# EAGLE board electronic_load (EAGLE 7.3.0)
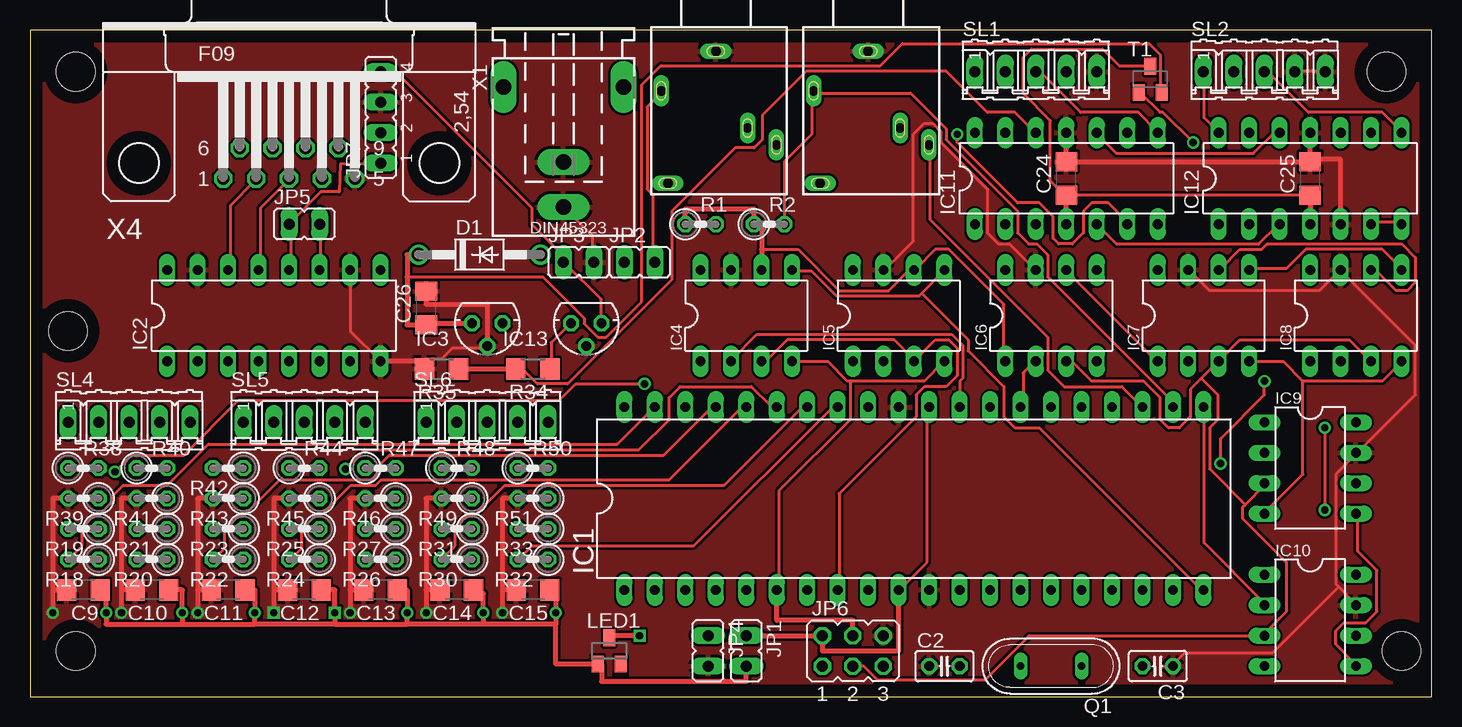
[diagram p0: board, top side]
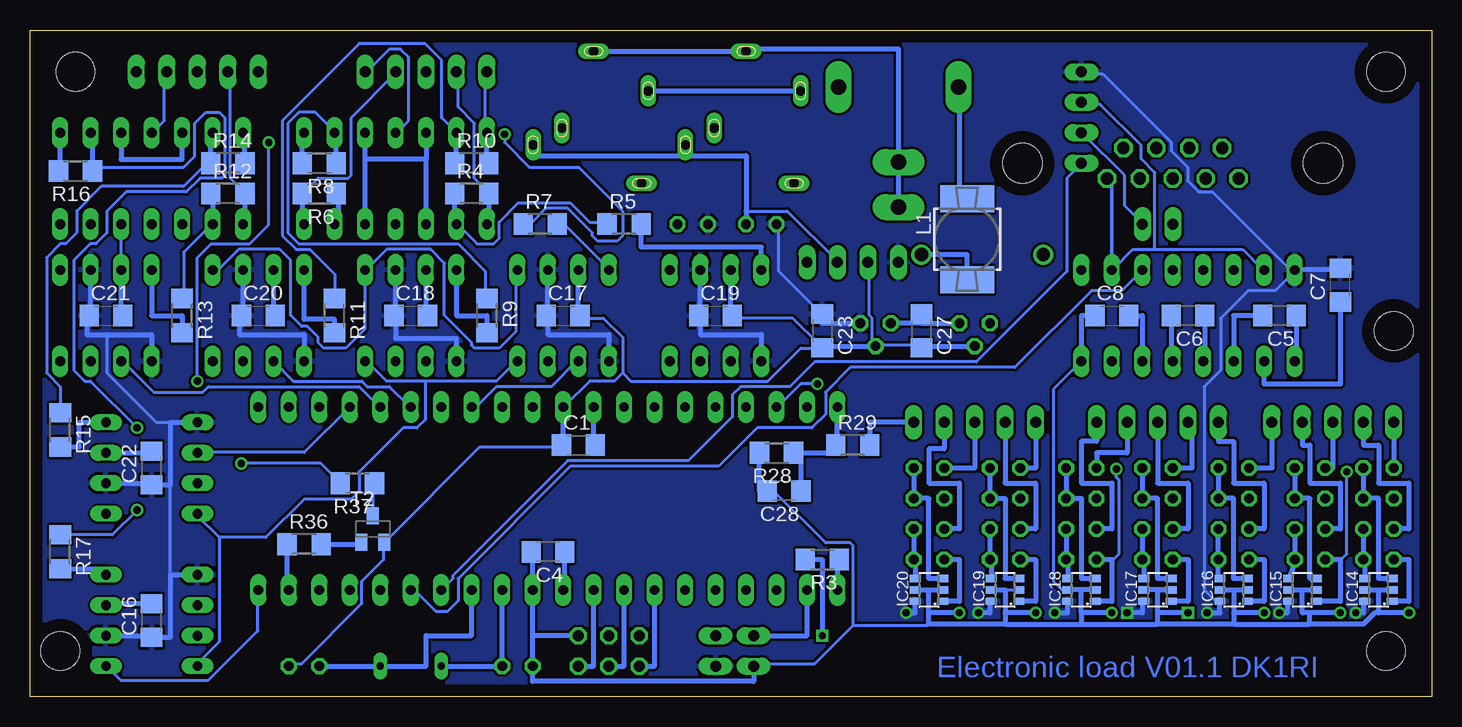
[diagram p1: board, bottom side, seen from below]

Size 116.82 x 55.55 mm. Coordinates in mm from the lower left corner, seen from the top.
Outline: 0,0 116.82,0 116.82,55.55 0,55.55 0,0
Copper layers (1*16): Top 0.035mm / dielectric 1.5mm / Bottom 0.035mm
Design rules "default": minimum track width 10mil, minimum drill 24mil, track to track 8mil, track to pad 8mil, pad to pad 8mil, via to via 8mil, smd to smd 8mil, copper to edge 40mil, drill to drill 8mil, minimum pad ring 10mil, minimum via ring 8mil, stop-mask expansion 4mil, vias tented up to drill 0mil, thermal gap 10mil
Holes 3.2 mm at 3.81,52.07 3.81,3.81 114.3,3.81 113.03,52.07 3.17,30.48

## Footprints (pad centres in the part's own frame; a part is rotated, then mirrored left to right if it is on the bottom)
C1206 = smd 1.6 x 1.8: 1 -1.4,0; 2 1.4,0
C025-025X050 = drill 0.813 octagon: 1 -1.27,0; 2 1.27,0
DO41-10 = drill 1.118: A 5.08,0; C -5.08,0
DIL40 = drill 0.813 long: 1 -24.13,-7.62; 2 -21.59,-7.62; 3 -19.05,-7.62; 4 -16.51,-7.62; 5 -13.97,-7.62; 6 -11.43,-7.62; 7 -8.89,-7.62; 8 -6.35,-7.62; 9 -3.81,-7.62; 10 -1.27,-7.62; 11 1.27,-7.62; 12 3.81,-7.62; 13 6.35,-7.62; 14 8.89,-7.62; 15 11.43,-7.62; 16 13.97,-7.62; 17 16.51,-7.62; 18 19.05,-7.62; 19 21.59,-7.62; 20 24.13,-7.62; 21 24.13,7.62; 22 21.59,7.62; 23 19.05,7.62; 24 16.51,7.62; 25 13.97,7.62; 26 11.43,7.62; 27 8.89,7.62; 28 6.35,7.62; 29 3.81,7.62; 30 1.27,7.62; 31 -1.27,7.62; 32 -3.81,7.62; 33 -6.35,7.62; 34 -8.89,7.62; 35 -11.43,7.62; 36 -13.97,7.62; 37 -16.51,7.62; 38 -19.05,7.62; 39 -21.59,7.62; 40 -24.13,7.62
DIL16 = drill 0.813 long: 1 -8.89,-3.81; 2 -6.35,-3.81; 3 -3.81,-3.81; 4 -1.27,-3.81; 5 1.27,-3.81; 6 3.81,-3.81; 7 6.35,-3.81; 8 8.89,-3.81; 9 8.89,3.81; 10 6.35,3.81; 11 3.81,3.81; 12 1.27,3.81; 13 -1.27,3.81; 14 -3.81,3.81; 15 -6.35,3.81; 16 -8.89,3.81
78LXX = drill 0.813 octagon: GND 0,1.905; IN 1.27,0; OUT -1.27,0
DIL08 = drill 0.813 long: 1 -3.81,-3.81; 2 -1.27,-3.81; 3 1.27,-3.81; 4 3.81,-3.81; 5 3.81,3.81; 6 1.27,3.81; 7 -1.27,3.81; 8 -3.81,3.81
DIL14 = drill 0.813 long: 1 -7.62,-3.81; 2 -5.08,-3.81; 3 -2.54,-3.81; 4 0,-3.81; 5 2.54,-3.81; 6 5.08,-3.81; 7 7.62,-3.81; 8 7.62,3.81; 9 5.08,3.81; 10 2.54,3.81; 11 0,3.81; 12 -2.54,3.81; 13 -5.08,3.81; 14 -7.62,3.81
SOT23-6 = smd 0.6 x 0.9: 1 -0.95,-1.15; 2 0,-1.15; 3 0.95,-1.15; 4 0.95,1.15; 5 0,1.15; 6 -0.95,1.15
JP1 = drill 0.914 long: 1 0,-1.27; 2 0,1.27
JP3Q = drill 0.914 octagon: 1 -2.54,-1.27; 2 -2.54,1.27; 3 0,-1.27; 4 0,1.27; 5 2.54,-1.27; 6 2.54,1.27
JP4 = drill 0.914 long: 1 -3.81,0; 2 -1.27,0; 3 1.27,0; 4 3.81,0
MS85 = smd 4.5 x 2.25: 1 0,-3.383; 2 0,3.383
SOT23 = smd 1 x 1.4: 1 -0.95,-1.1; 2 0.95,-1.1; 3 0,1.1
QS = drill 0.61 long: 1 -2.54,0; 2 2.54,0
0207/2V = drill 0.813 octagon: 1 -1.27,0; 2 1.27,0
R1206 = smd 1.6 x 1.803: 1 -1.422,0; 2 1.422,0
05P = drill 0.914 long: 1 -5.08,0; 2 -2.54,0; 3 0,0; 4 2.54,0; 5 5.08,0
SOT23-BEC = smd 1 x 1.4: B -0.95,-1.1; C 0,1.1; E 0.95,-1.1
737992-5 = drill 1.3 pad 2.184 long: + 0,10; -1 5,0; -2 -5,0; K 0,6.25
1503_09 = drill 0.8 pad 1.2 long: 1 0,-2.1; 2 -4.55,-5.4; 3 5.05,-9.9; 4 -4,-13.1; 5 2.65,-8.5
F09H = drill 1.016 octagon: 1 -5.486,-1.27; 2 -2.743,-1.27; 3 0,-1.27; 4 2.743,-1.27; 5 5.486,-1.27; 6 -4.115,1.27; 7 -1.372,1.27; 8 1.372,1.27; 9 4.115,1.27 | hole 3.302: -12.522,0; 12.522,0

## Placement (x,y rotation side)
C1  22uF 1210  [C1206]  71.12,20.95 0 bottom
C2  18pF  [C025-025X050]  76.2,2.54 0 top
C3  18pF  [C025-025X050]  93.98,2.54 180 top
C4  22uF 1210  [C1206]  73.66,12.06 180 bottom
C5  22u 1210  [C1206]  12.7,31.75 180 bottom
C6  22u 1210  [C1206]  20.32,31.75 180 bottom
C7  22u 1210  [C1206]  7.62,34.29 90 bottom
C8  22u 1210  [C1206]  26.67,31.75 0 bottom
C9  22uF 1210  [C1206]  4.45,8.89 180 top
C10  22uF 1210  [C1206]  10.16,8.89 180 top
C11  22uF 1210  [C1206]  16.51,8.89 180 top
C12  22uF 1210  [C1206]  22.86,8.89 180 top
C13  22uF 1210  [C1206]  29.21,8.89 180 top
C14  22uF 1210  [C1206]  35.56,8.89 180 top
C15  22uF 1210  [C1206]  41.91,8.89 180 top
C16  22uF 1210  [C1206]  106.68,6.35 90 bottom
C17  22uF 1210  [C1206]  72.39,31.75 0 bottom
C18  22uF 1210  [C1206]  85.09,31.75 0 bottom
C19  22uF 1210  [C1206]  59.69,31.75 0 bottom
C20  22uF 1210  [C1206]  97.79,31.75 0 bottom
C21  22uF 1210  [C1206]  110.49,31.75 0 bottom
C22  22uF 1210  [C1206]  106.68,19.05 90 bottom
C23  22uF 1210  [C1206]  50.8,30.48 270 bottom
C24  22uF 1210  [C1206]  86.36,43.18 90 top
C25  22uF 1210  [C1206]  106.68,43.18 90 top
C26  22uF 1210  [C1206]  33.02,32.38 90 top
C27  22uF 1210  [C1206]  42.55,30.48 270 bottom
C28  1u  [C1206]  53.98,17.14 180 bottom
D1  1N4004  [DO41-10]  37.47,36.83 0 top
IC1  MEGA16-P  [DIL40]  73.66,16.51 0 top
IC2  MAX232  [DIL16]  20.32,31.75 0 top
IC3  79L09  [78LXX]  38.1,31.11 180 top
IC4  MCP4921  [DIL08]  59.69,31.75 0 top
IC5  MCP4921  [DIL08]  72.39,31.75 0 top
IC6  MCP4921  [DIL08]  85.09,31.75 0 top
IC7  MCP4921  [DIL08]  97.79,31.75 0 top
IC8  MCP4921  [DIL08]  110.49,31.75 0 top
IC9  MCP4921  [DIL08]  106.68,19.05 270 top
IC10  MCP4921  [DIL08]  106.68,6.35 270 top
IC11  LM324N  [DIL14]  86.36,43.18 0 top
IC12  LM324N  [DIL14]  106.68,43.18 0 top
IC13  78L5  [78LXX]  46.35,31.11 180 top
IC14  MCP603CH  [SOT23-6]  4.45,8.89 90 bottom
IC15  MCP603CH  [SOT23-6]  10.79,8.89 90 bottom
IC16  MCP603CH  [SOT23-6]  16.51,8.89 90 bottom
IC17  MCP603CH  [SOT23-6]  22.86,8.89 90 bottom
IC18  MCP603CH  [SOT23-6]  29.21,8.89 90 bottom
IC19  MCP603CH  [SOT23-6]  35.56,8.89 90 bottom
IC20  MCP603CH  [SOT23-6]  41.91,8.89 90 bottom
JP1  Power  [JP1]  59.69,3.81 180 top
JP2  I2C  [JP1]  50.8,36.2 270 top
JP3  5V  [JP1]  45.72,36.2 270 top
JP4  Reset  [JP1]  56.52,3.81 180 top
JP5  Rs232-TTL  [JP1]  22.86,39.37 270 top
JP6  ISP  [JP3Q]  68.58,3.81 0 top
JP7  USB  [JP4]  29.21,48.26 90 top
L1  22u  [MS85]  38.73,38.1 180 bottom
LED1  PL006-WCY01  [SOT23]  48.26,3.81 0 top
Q1  20MHz  [QS]  85.09,2.54 180 top
R1  4k7  [0207/2V]  55.88,39.37 0 top
R2  4k7  [0207/2V]  61.59,39.37 0 top
R3  4k7  [R1206]  50.8,11.43 180 bottom
R4  12k  [R1206]  80.01,41.91 0 bottom
R5  8k2  [R1206]  67.31,39.37 0 bottom
R6  12k  [R1206]  92.71,41.91 180 bottom
R7  8k2  [R1206]  74.3,39.37 0 bottom
R8  12k  [R1206]  92.71,44.45 180 bottom
R9  8k2  [R1206]  78.74,31.75 270 bottom
R10  12k  [R1206]  80.01,44.45 0 bottom
R11  8k2  [R1206]  91.44,31.75 270 bottom
R12  12k  [R1206]  100.33,41.91 0 bottom
R13  8k2  [R1206]  104.14,31.75 270 bottom
R14  12k  [R1206]  100.33,44.45 0 bottom
R15  8k2  [R1206]  114.3,22.23 270 bottom
R16  12k  [R1206]  113.03,43.81 180 bottom
R17  8k2  [R1206]  114.3,12.06 270 bottom
R18  154k  [0207/2V]  4.45,11.43 180 top
R19  18k  [0207/2V]  4.45,13.97 180 top
R20  154k  [0207/2V]  10.16,11.43 180 top
R21  18k  [0207/2V]  10.16,13.97 180 top
R22  154k  [0207/2V]  16.51,11.43 180 top
R23  18k  [0207/2V]  16.51,13.97 180 top
R24  154k  [0207/2V]  22.86,11.43 180 top
R25  18k  [0207/2V]  22.86,13.97 180 top
R26  154k  [0207/2V]  29.21,11.43 180 top
R27  18k  [0207/2V]  29.21,13.97 180 top
R28  1k5  [R1206]  54.61,20.32 180 bottom
R29  180  [R1206]  48.26,20.95 0 bottom
R30  154k  [0207/2V]  35.56,11.43 180 top
R31  18k  [0207/2V]  35.56,13.97 180 top
R32  154k  [0207/2V]  41.91,11.43 180 top
R33  18k  [0207/2V]  41.91,13.97 180 top
R34  8k2  [R1206]  41.91,27.3 180 top
R35  18k  [R1206]  34.29,27.3 180 top
R36  10k  [R1206]  93.98,12.7 0 bottom
R37  10k  [R1206]  89.53,17.78 180 bottom
R38  154k  [0207/2V]  4.45,19.05 0 top
R39  18k  [0207/2V]  4.45,16.51 180 top
R40  154k  [0207/2V]  10.16,19.05 0 top
R41  18k  [0207/2V]  10.16,16.51 180 top
R42  154k  [0207/2V]  16.51,19.05 180 top
R43  18k  [0207/2V]  16.51,16.51 180 top
R44  154k  [0207/2V]  22.86,19.05 0 top
R45  18k  [0207/2V]  22.86,16.51 180 top
R46  18k  [0207/2V]  29.21,16.51 180 top
R47  154k  [0207/2V]  29.21,19.05 0 top
R48  154k  [0207/2V]  35.56,19.05 0 top
R49  18k  [0207/2V]  35.56,16.51 180 top
R50  154k  [0207/2V]  41.91,19.05 0 top
R51  18k  [0207/2V]  41.91,16.51 180 top
SL1  Gates1  [05P]  83.82,52.07 0 top
SL2  Gates2  [05P]  102.87,52.07 0 top
SL4  Iin  [05P]  8.26,22.86 0 top
SL5  Iin  [05P]  22.86,22.86 0 top
SL6  U/Iin  [05P]  38.1,22.86 0 top
T1  BC807  [SOT23-BEC]  93.34,51.44 0 top
T2  BC817  [SOT23-BEC]  88.27,13.97 0 bottom
X1  8-15V  [737992-5]  44.45,50.8 180 top
X2  1503_09  [1503_09]  69.85,55.88 0 top
X3  1503_09  [1503_09]  57.15,55.88 0 top
X4  RS232  [F09H]  21.59,44.45 0 top

## Library data of the parts
C1 C4-C27 = rcl
C2 C3 C28 R1-R51 = resistor
D1 = diode
IC1 = atmel; MPN: ATMEGA16-16PU; OC_FARNELL: 9171142; OC_NEWARK: 01M6885
IC2 = maxim; MF: MAXIM; MPN: MAX232ACPE+; OC_FARNELL: 9723773; OC_NEWARK: 68K4544
IC3 IC13 = v-reg
IC4-IC10 = dac
IC11 IC12 IC14-IC20 = linear
JP1-JP7 = jumper
L1 = inductor-neosid; OC_FARNELL: unknown; OC_NEWARK: unknown
LED1 = led
Q1 = special
SL1 SL2 SL4-SL6 = con-amp-quick; OC_FARNELL: unknown; OC_NEWARK: unknown
T1 T2 = transistor
X1 = con-conrad
X2 X3 = con-lumberg; OC_FARNELL: 1243244; OC_NEWARK: unknown
X4 = con-subd; OC_FARNELL: unknown; OC_NEWARK: unknown

## Nets
9V: C27.1 IC3.OUT IC13.IN R34.1
C13: C5.1 IC2.1
FET1: IC12.8 R16.2 SL2.3
FET2: IC12.1 R12.2 SL2.2
FET3: IC12.14 R14.2 SL2.1
FET4: IC11.7 R6.2 SL1.4
FET5: IC11.8 R8.2 SL1.3
FET6: IC11.1 R4.2 SL1.2
FET7: IC11.14 R10.2 SL1.1
GND: C1.1 C2.1 C3.1 C4.2 C8.1 C9.2 C10.2 C11.2 C12.2 C13.2 C14.2 C15.2 C16.2 C17.2 C18.2 C19.2 C20.2 C21.2 C22.2 C23.2 C24.2 C25.2 C26.2 C27.2 C28.2 IC1.11 IC1.31 IC2.8 IC2.10 IC2.15 IC3.GND IC4.7 IC5.7 IC6.7 IC7.7 IC8.7 IC9.7 IC10.7 IC11.11 IC12.5 IC12.11 IC13.GND IC14.2 IC14.5 IC15.2 IC15.5 IC16.2 IC16.5 IC17.2 IC17.5 IC18.2 IC18.5 IC19.2 IC19.5 IC20.2 IC20.5 JP3.2 JP4.2 JP6.6 JP7.3 R28.2 R35.2 R39.2 R41.2 R43.2 R45.2 R46.2 R49.2 R51.2 SL1.5 SL2.4 SL2.5 T2.E X1.+ X1.K X2.1 X3.1 X4.5
GON: IC1.19 R36.1
I1: IC1.39 IC14.1 R18.2
I2: IC1.38 IC15.1 R20.2
I3: IC1.37 IC16.1 R22.2
I4: IC1.36 IC17.1 R24.2
I5: IC1.35 IC18.1 R26.2
I6: IC1.34 IC19.1 R30.2
I7: IC1.33 IC20.1 R32.2
N$1: IC14.4 R18.1 R19.1
N$2: IC1.14 IC2.12 JP5.1 JP7.1
N$3: C6.2 IC2.5
N$4: IC1.21 IC10.2
N$5: IC1.23 JP2.1 R1.2 X2.3 X3.3
N$6: IC1.15 IC2.11 JP5.2 JP7.2
N$7: L1.1 X1.-1
N$8: IC1.24 IC9.2
N$9: IC2.13 X4.3
N$10: IC6.8 R9.2
N$11: IC1.20 IC4.5 IC5.5 IC6.5 IC7.5 IC8.5 IC9.5 IC10.5
N$12: D1.A L1.2
N$13: C6.1 IC2.4
N$14: C5.2 IC2.3
N$15: IC1.7 JP6.1
N$16: C7.1 IC2.2
N$17: C8.2 IC2.6
N$18: IC1.9 JP6.5
N$19: C2.2 IC1.12 Q1.2
N$20: IC1.6 IC4.4 IC5.4 IC6.4 IC7.4 IC8.4 IC9.4 IC10.4 JP6.4
N$21: IC7.8 R11.2
N$22: IC1.22 JP2.2 R2.2 X2.2 X3.2
N$23: IC1.25 IC8.2
N$24: IC8.8 R13.2
N$25: C4.1 IC1.10 IC1.30 JP1.1 JP6.2
N$26: IC9.8 R15.2
N$27: R29.2 SL6.5
N$28: IC1.8 IC4.3 IC5.3 IC6.3 IC7.3 IC8.3 IC9.3 IC10.3 JP6.3
N$29: R21.2 SL4.4
N$30: IC15.4 R20.1 R21.1
N$31: IC4.8 R5.2
N$32: IC20.4 R32.1 R33.1
N$33: IC2.14 X4.2
N$34: IC19.4 R30.1 R31.1
N$35: C1.2 IC1.32
N$36: IC11.13 R10.1 R11.1
N$37: C3.2 IC1.13 Q1.1
N$38: IC11.9 R8.1 R9.1
N$39: IC10.8 R17.2
N$40: IC12.13 R14.1 R15.1
N$41: IC16.4 R22.1 R23.1
N$42: IC1.1 R3.1
N$43: LED1.3 R3.2
N$44: IC17.3 R44.2 R45.1
N$45: IC17.4 R24.1 R25.1
N$46: IC1.2 JP4.1
N$47: IC18.4 R26.1 R27.1
N$48: R47.1 SL5.4
N$49: IC15.3 R40.2 R41.1
N$50: IC1.29 IC4.2
N$51: IC1.26 IC7.2
N$52: R48.1 SL6.1
N$53: R31.2 SL6.2
N$54: R25.2 SL5.3
N$55: IC5.8 R7.2
N$56: C26.1 D1.C IC3.IN T1.E
N$57: IC12.2 R12.1 R13.1
N$58: IC12.9 R16.1 R17.1
N$59: C24.1 C25.1 IC11.4 IC12.4 T1.C
N$60: R27.2 SL5.5
N$61: R37.2 T1.B
N$62: IC1.28 IC5.2
N$63: R37.1 T2.C
N$64: R36.2 T2.B
N$65: R38.1 SL4.1
N$66: R40.1 SL4.3
N$67: IC14.3 R38.2 R39.1
N$68: R42.2 SL4.5
N$69: R19.2 SL4.2
N$70: R44.1 SL5.2
N$71: IC1.27 IC6.2
N$72: IC18.3 R46.1 R47.2
N$73: IC11.6 R6.1 R7.1
N$74: IC19.3 R48.2 R49.1
N$76: R50.1 SL6.3
N$79: R23.2 SL5.1
N$80: IC16.3 R42.1 R43.1
N$89: R33.2 SL6.4
N$90: IC20.3 R50.2 R51.1
N$91: IC11.2 R4.1 R5.1
N$96: IC12.6 IC12.7
U: C28.1 IC1.40 R28.1 R29.1
VDD: C7.2 C9.1 C10.1 C11.1 C12.1 C13.1 C14.1 C15.1 C16.1 C17.1 C18.1 C19.1 C20.1 C21.1 C22.1 C23.1 IC2.16 IC4.1 IC4.6 IC5.1 IC5.6 IC6.1 IC6.6 IC7.1 IC7.6 IC8.1 IC8.6 IC9.1 IC9.6 IC10.1 IC10.6 IC13.OUT IC14.6 IC15.6 IC16.6 IC17.6 IC18.6 IC19.6 IC20.6 JP1.2 JP3.1 JP7.4 LED1.1 R1.1 R2.1
VREF: IC11.3 IC11.5 IC11.10 IC11.12 IC12.3 IC12.10 IC12.12 R34.2 R35.1

## Tracks (layer width: path | path; a pad name or v marks a point on that pad's centre or on a via)
9V
  Top 0.254: R34.1 43.43,27.43 43.43,29.49 45.03,31.09 IC13.IN
  Bottom 0.406: 42.55,31.11 IC3.OUT | C27.1 42.55,31.11 | 42.55,31.11 IC13.IN
C13
  Bottom 0.406: C5.1 11.3,27.94 IC2.1
FET1
  Top 0.254: SL2.3 102.87,51.89 103.33,51.89 106.53,48.69 112.7,48.69 114.3,47.09 IC12.8
  Bottom 0.406: R16.2 114.3,43.81 IC12.8
FET2
  Bottom 0.254: SL2.2 100.13,51.89 100.13,43.2 98.98,42.06 R12.2
  Bottom 0.406: R12.2 98.91,39.52 IC12.1
FET3
  Top 0.254: SL2.1 97.84,51.89 97.84,48.23 98.98,47.09 IC12.14
  Bottom 0.406: R14.2 98.91,46.84 IC12.14
FET4
  Bottom 0.254: SL1.4 86.41,51.89 90.07,48.23 90.07,43.43 90.3,43.2 92.81,43.2 93.95,42.06 R6.2
  Bottom 0.406: R6.2 94.13,39.52 IC11.7
FET5
  Top 0.254: SL1.3 83.9,51.89 84.35,51.89 87.55,48.69 92.35,48.69 93.95,47.09 IC11.8
  Bottom 0.406: R8.2 94.13,46.84 IC11.8
FET6
  Bottom 0.254: SL1.2 81.15,51.89 81.15,49.15 79.78,47.78 79.78,43.2 78.64,42.06 R4.2
  Bottom 0.406: R4.2 78.59,39.52 IC11.1
FET7
  Bottom 0.254: SL1.1 78.87,51.89 78.87,47.09 IC11.14
  Bottom 0.406: R10.2 78.74,44.45 IC11.14
GND  (via drill 0.6)
  Top 0.254: JP3.2 46.86,36.35 46.86,38.41 44.58,40.69 X1.+ | R35.2 32.92,28.12 34.29,28.12 35.2,29.03 37.95,29.03 IC3.GND | IC2.8 26.75,30.4 26.75,35.43 IC2.10 | IC7.7 96.7,35.43 98.3,33.83 107.44,33.83 109.04,35.43 IC8.7 109.27,35.43 115.44,29.26 115.44,25.15 110.64,20.34 IC9.7 110.41,20.12 108.81,18.52 108.81,9.37 109.04,9.14 | SL2.4 105.61,52.12 107.9,52.12 SL2.5 | IC6.7 83.67,35.66 81.61,37.72 80.7,37.72 79.78,38.63 79.78,42.29 75.89,46.18 75.89,47.09 75.21,47.78 74.52,47.78 73.61,46.86 73.61,37.95 71.32,35.66 IC5.7 | 109.04,9.14 110.41,7.77 IC10.7 | 109.04,9.14 103.56,3.66 96.24,3.66 95.33,2.74 C3.1
  Top 0.406: C9.2 1.91,8.89 | 1.91,8.89 v1.91,6.99 | R39.2 1.91,16.51 1.91,8.89 | C10.2 7.62,8.89 | 7.62,8.89 v7.62,6.99 | R41.2 7.62,16.51 7.62,8.89 | R43.2 13.97,16.51 13.97,8.89 | C11.2 13.97,8.89 | 13.97,8.89 v13.97,6.99 | R45.2 20.32,16.51 20.32,8.89 | C12.2 20.32,8.89 | 20.32,8.89 v20.32,6.99 | R46.2 26.67,16.51 26.67,8.89 | 26.67,8.89 C13.2 | 26.67,8.89 v26.67,6.99 | R49.2 33.02,16.51 33.02,8.89 | C14.2 33.02,8.89 | 33.02,8.89 v33.02,6.99 | R51.2 39.37,16.51 39.37,8.89 | C15.2 39.37,8.89 | 39.37,8.89 v39.37,6.99 | IC11.11 C24.2 C25.2 | C25.2 IC12.11 | C26.2 33.02,32.7 38.1,32.7 IC3.GND | R35.2 32.87,27.94 IC2.8 | IC12.5 109.22,44.77 106.68,44.77 C25.2
  Bottom 0.254: IC19.2 34.52,8.91 35.43,8.91 35.56,8.89 | 48.23,5.94 42.06,5.94 41.91,6.03 | 48.23,5.94 51.44,2.74 56.46,2.74 JP4.2 | C28.2 54.86,17.14 50.52,12.8 48.46,12.8 48.23,12.57 48.23,5.94 | 23.09,37.26 24.92,37.26 26.52,35.66 IC2.10 | 23.09,37.26 15.77,37.26 14.17,35.66 IC2.15 | 23.09,37.26 23.09,43.66 24.23,44.81 24.23,45.95 27.66,49.38 29.03,49.38 JP7.3 | C19.2 58.06,31.55 53.26,31.55 50.98,29.26 C23.2 50.98,29.03 52.58,29.03 55.32,26.29 66.75,26.29 67.44,26.98 | C27.2 42.75,29.26 46.18,29.26 IC13.GND 46.63,29.26 46.63,31.55 46.86,31.77 46.86,36.12 JP3.2 | IC2.8 31.55,25.6 31.55,9.6 30.86,8.91 30.4,8.91 IC18.5 | SL1.5 88.7,52.12 86.87,53.95 85.95,53.95 85.27,53.26 85.27,48.01 86.18,47.09 IC11.11 | SL2.4 105.61,51.89 105.61,48.01 106.53,47.09 IC12.11 | IC8.7 109.27,35.66 109.27,39.32 IC12.5 | 67.44,26.98 68.12,26.29 70.18,26.29 72.24,24.23 IC1.31 | 67.44,26.98 67.44,29.95 69.04,31.55 70.87,31.55 C17.2 | C3.1 95.1,2.74 94.18,2.74 89.15,7.77 89.15,9.6 87.33,11.43 87.33,12.8 T2.E 87.1,13.03 79.32,20.8 72.69,20.8 C1.1
  Bottom 0.305: X4.5 26.67,43.18 IC2.10
  Bottom 0.406: v1.91,6.99 4.45,6.99 | 4.45,6.99 4.45,8.89 | 4.45,8.89 IC14.2 | 4.45,8.89 IC14.5 5.71,8.89 | 4.45,6.99 4.76,6.99 5.71,6.03 10.16,6.03 | 10.16,6.03 10.16,6.99 | 10.16,6.99 10.79,6.99 10.79,8.89 | IC15.5 10.79,8.89 | 10.79,8.89 IC15.2 | v7.62,6.99 10.16,6.99 | v13.97,6.99 16.51,6.99 | IC16.2 IC16.5 16.51,8.89 16.51,6.99 | 16.51,6.99 16.51,6.03 | 16.51,6.03 10.16,6.03 | v20.32,6.99 22.86,6.99 | 22.86,6.99 22.86,8.89 IC17.2 IC17.5 | 16.51,6.03 22.86,6.03 | 22.86,6.03 22.86,6.99 | v26.67,6.99 29.21,6.99 | 29.21,6.99 29.21,8.89 IC18.2 IC18.5 | 29.21,6.99 29.21,6.03 | 29.21,6.03 22.86,6.03 | v33.02,6.99 35.56,6.99 | 35.56,6.99 35.56,6.03 | 35.56,6.03 29.21,6.03 | v39.37,6.99 41.91,6.99 | 41.91,6.99 41.91,8.89 | 41.91,8.89 IC20.2 | IC20.5 41.91,8.89 | IC19.5 35.56,8.89 35.56,6.99 | 35.56,6.03 41.91,6.03 41.91,6.99 | C4.2 75.06,11.43 74.93,11.43 IC1.11 74.93,5.08 | C1.1 72.39,20.95 IC1.31 | C16.2 110.49,7.75 IC10.7 | IC9.7 106.68,20.32 C22.2 | C21.2 109.22,31.75 IC8.7 | C20.2 96.52,31.75 IC7.7 | C18.2 83.82,31.75 IC6.7 | C17.2 71.12,31.75 IC5.7 | C19.2 58.42,31.75 IC4.7 | 69.85,53.66 X2.1 X3.1 57.15,53.98 44.45,53.98 X1.K X1.+ | C27.2 42.55,29.21 IC3.GND | C23.2 50.8,29.21 IC13.GND | C8.1 29.21,31.75 IC2.8 | JP6.6 74.93,5.08 | 74.93,5.08 C2.1 74.93,1.27 56.52,1.27 JP4.2 | C28.2 56.03,17.14 R28.2
  pour Top: 115.89,54.93 0.95,54.93 0.95,0.64 115.89,0.64
GON
  Bottom 0.406: IC1.19 95.4,8.89 R36.1
I1
  Top 0.254: IC1.39 51.89,24 48.92,21.03 14.86,21.03 11.43,17.6 7.77,17.6 6.86,16.69 6.86,16.23 5.71,15.09 5.26,15.09 4.34,14.17 4.34,12.57 3.2,11.43 R18.2
  Bottom 0.406: R18.2 1.91,11.43 1.91,7.94 IC14.1
I2  (via drill 0.61)
  Top 0.254: v51.21,26.06 45.49,26.06 44.12,24.69 17.37,24.69 12.8,20.12 8.46,20.12 v7.09,18.75
  Bottom 0.254: v51.21,26.06 52.58,26.06 54.41,24.23 IC1.38 | v7.09,18.75 7.09,11.89 7.54,11.43 7.62,11.43
  Bottom 0.406: R20.2 7.62,11.43 7.62,7.94 IC15.1
I3
  Top 0.254: IC1.37 57.15,24 56.69,24 52.81,20.12 29.95,20.12 29.03,19.2 29.03,18.52 28.57,18.06 20.8,18.06 17.83,15.09 17.37,15.09 16.23,13.95 16.23,12.34 15.32,11.43 R22.2
  Bottom 0.406: R22.2 13.97,11.43 13.97,7.94 IC16.1
I4
  Top 0.254: IC1.36 59.66,24 59.21,24 53.26,18.06 29.26,18.06 28.8,17.6 26.75,17.6 24.23,15.09 23.77,15.09 22.63,13.95 22.63,12.34 21.72,11.43 R24.2
  Bottom 0.406: R24.2 20.32,11.43 20.32,7.94 IC17.1
I5  (via drill 0.61)
  Top 0.254: v26.29,18.97 27.89,20.57 50.75,20.57 53.26,23.09 53.26,24.92 54.18,25.83 60.12,25.83 61.72,24.23 62.18,24.23 IC1.35
  Bottom 0.254: v26.29,18.97 26.29,18.29 26.06,18.06 26.06,11.89 26.52,11.43 26.67,11.43
  Bottom 0.406: R26.2 26.67,11.43 26.67,7.94 IC18.1
I6
  Top 0.254: R30.2 35.43,12.57 35.43,14.17 36.35,15.09 37.03,15.09 39.55,17.6 57.84,17.6 64.24,24 64.69,24 IC1.34
  Bottom 0.406: R30.2 33.02,11.43 33.02,7.94 IC19.1
I7
  Top 0.254: IC1.33 67.21,24 66.75,24 55.32,12.57 41.83,12.57 40.69,11.43 R32.2
  Bottom 0.406: R32.2 39.37,11.43 39.37,7.94 IC20.1
N$1
  Bottom 0.406: R19.1 R18.1 5.59,11.43 IC14.4
N$2
  Top 0.254: IC2.12 21.72,35.66 21.72,39.32 JP5.1 21.72,39.55 24.23,42.06 25.76,42.06 25.86,44.39 29.03,44.35 JP7.1
  Bottom 0.254: IC1.14 81.61,9.83 81.61,10.06 72.01,19.66 61.95,19.66 58.29,23.32 58.29,25.15 57.61,25.83 53.49,25.83 51.44,27.89 37.95,27.89 30.4,35.43 30.4,43.2 29.26,44.35 JP7.1
N$3
  Bottom 0.406: C6.2 21.72,27.94 IC2.5
N$4
  Top 0.254: IC1.21 97.84,24 97.84,12.8 102.87,7.77 IC10.2
N$5
  Top 0.254: IC1.23 92.58,24.23 90.98,25.83 86.18,25.83 84.81,27.2 84.81,29.95 74.98,39.78 74.98,45.95 X2.3
  Bottom 0.254: 57.15,40.46 53.72,40.46 49.61,36.35 JP2.1
  Bottom 0.406: X2.3 75.25,45.98 75.25,45.09 62.2,45.09 | 62.2,45.09 X3.3 | 62.2,45.09 57.15,45.09 57.15,40.46 R1.2
N$6
  Top 0.254: JP5.2 24.23,39.32 24.23,35.66 IC2.11
  Bottom 0.254: IC1.15 85.04,8.69 84.58,8.69 82.98,7.09 82.07,7.09 81.15,8 81.15,9.83 71.78,19.2 59.44,19.2 56.24,22.4 51.66,22.4 50.52,23.55 50.52,25.38 48.46,27.43 34.75,27.43 28.35,33.83 25.83,33.83 24.23,35.43 IC2.11 | JP7.2 29.03,46.86 25.6,43.43 25.6,40.92 24.23,39.55 JP5.2
N$7
  Bottom 0.406: X1.-1 39.37,50.8 39.37,41.48 L1.1
N$8
  Bottom 0.254: IC1.24 93.95,20.34 102.87,20.34 IC9.2
N$9
  Top 0.254: IC2.13 19.2,35.66 19.2,40.69 21.49,42.98 X4.3
N$10
  Bottom 0.406: IC6.8 81.28,31.75 78.74,31.75 R9.2
N$11
  Top 0.254: IC9.5 110.64,15.09 110.64,12.12 112.24,10.52 112.24,7.09 111.33,6.17 109.5,6.17 108.81,5.49 108.81,4.34 110.41,2.74 IC10.5 | IC7.5 101.73,35.66 104.7,35.66 106.3,37.26 112.7,37.26 114.3,35.66 IC8.5 | 74.3,33.6 76.12,35.43 IC5.5 | 74.3,33.6 74.07,33.38 67.21,33.38 65.15,35.43 63.55,35.43 IC4.5 | 74.3,33.6 78.18,29.72 78.18,28.8 81.15,25.83 81.15,23.32 82.07,22.4 84.12,22.4 97.61,8.91 IC1.20
  Bottom 0.254: IC1.20 97.84,8.69 97.84,5.49 101.96,1.37 109.27,1.37 110.41,2.52 IC10.5 | IC5.5 76.35,35.43 76.35,30.4 77.72,29.03 79.78,29.03 80.01,29.26 80.01,29.49 82.3,31.77 82.3,36.12 83.44,37.26 87.1,37.26 88.7,35.66 IC6.5 88.92,35.43 88.92,30.63 90.53,29.03 92.35,29.03 92.81,29.49 92.81,29.95 93.73,30.86 94.18,30.86 95.1,31.77 95.1,36.35 96.01,37.26 99.44,37.26 101.04,35.66 101.5,35.66 IC7.5
N$12
  Bottom 0.406: L1.2 38.73,36.83 D1.A
N$13
  Bottom 0.406: C6.1 18.92,27.94 IC2.4
N$14
  Bottom 0.406: C5.2 16.51,31.75 IC2.3
N$15
  Bottom 0.406: JP6.1 64.77,2.54 IC1.7
N$16
  Bottom 0.406: C7.1 7.62,26.04 13.97,26.04 IC2.2
N$17
  Bottom 0.406: C8.2 24.13,31.75 IC2.6
N$18
  Bottom 0.406: JP6.5 69.85,2.54 IC1.9
N$19
  Bottom 0.406: Q1.2 C2.2 IC1.12
N$20
  Top 0.254: 106.07,26.29 104.47,27.89 101.73,27.89 IC7.4 | 106.07,26.29 112.7,26.29 114.3,27.89 IC8.4 | 106.07,26.29 106.07,18.52 102.87,15.32 IC9.4 | 68.35,26.29 74.52,26.29 76.12,27.89 IC5.4 | 68.35,26.29 68.12,26.29 66.52,27.89 63.55,27.89 IC4.4 | 68.35,26.29 68.35,23.09 62.41,17.14 62.41,8.91 IC1.6
  Top 0.406: JP6.4 68.58,6.35 62.23,6.35 IC1.6
  Bottom 0.254: 101.04,13.26 101.04,4.57 102.87,2.74 IC10.4 | 101.04,13.26 102.87,15.09 IC9.4 | 83.9,26.29 77.95,26.29 76.35,27.89 IC5.4 | 83.9,26.29 87.1,26.29 88.7,27.89 IC6.4 | 101.04,13.26 97.16,13.26 93.95,16.46 90.07,16.46 89.38,17.14 89.38,18.75 85.72,22.4 84.58,22.4 83.9,23.09 83.9,26.29
N$21
  Bottom 0.406: R11.2 91.44,31.43 93.98,31.43 IC7.8
N$22
  Top 0.254: IC1.22 95.1,24.23 95.1,24.69 84.81,34.98 84.81,36.8 83.9,37.72 83.21,37.72 82.3,38.63 82.3,40.46 76.35,46.41 76.35,47.32 73.38,50.29 65.38,50.29 X2.2 65.15,50.29 65.15,46.86 62.87,44.58 R2.2 | JP2.2 51.89,36.35 51.89,41.83 51.44,42.29 51.44,49.15 52.58,50.29 X3.2
  Bottom 0.406: X2.2 X3.2
N$23
  Bottom 0.254: IC1.25 87.78,24.23 89.38,25.83 101.96,25.83 102.41,25.38 106.53,25.38 109.04,27.89 IC8.2
N$24
  Bottom 0.406: IC8.8 106.68,31.75 104.14,31.75 R13.2 104.14,30.16
N$25
  Top 0.254: IC1.30 74.75,24 74.75,11.2 72.47,8.91 IC1.10
  Top 0.406: IC1.10 72.39,3.81 66.04,3.81 JP6.2 JP1.1
  Bottom 0.406: IC1.10 72.26,8.89 C4.1
N$26
  Bottom 0.406: R15.2 112.71,20.8 112.71,22.86 IC9.8
N$27
  Bottom 0.406: SL6.5 46.84,22.86 R29.2
N$28
  Top 0.254: IC4.3 61.04,28.12 61.49,28.12 63.09,29.72 72.01,29.72 73.61,28.12 IC5.3 75.44,29.72 76.58,29.72 77.27,29.03 77.27,26.75 76.35,25.83 74.52,25.83 73.84,25.15 73.84,23.32 67.44,16.92 67.44,8.91 IC1.8 | 101.27,16 102.87,17.6 IC9.3 | 101.27,16 101.04,15.77 101.04,14.86 104.7,11.2 104.7,7.09 102.87,5.26 IC10.3 102.87,5.03 83.21,5.03 79.55,1.37 70.64,1.37 69.49,2.52 68.58,2.52 JP6.3 | 97.61,26.52 98.98,27.89 IC7.3 99.21,28.12 100.81,29.72 109.96,29.72 111.56,28.12 IC8.3 | 97.61,26.52 96.7,25.6 96.7,23.32 95.78,22.4 94.87,22.4 94.18,23.09 94.18,24.92 92.81,26.29 88.47,26.29 86.87,27.89 86.41,27.89 IC6.3 | 101.27,16 98.3,18.97 98.3,22.4 98.98,23.09 98.98,25.15 97.61,26.52
  Bottom 0.406: JP6.3 67.31,2.54 IC1.8
N$29
  Bottom 0.406: SL4.4 10.79,20.95 10.16,20.95 10.16,17.78 7.62,17.78 7.62,13.97 R21.2
N$30
  Bottom 0.406: R21.1 R20.1 11.31,11.43 IC15.4
N$31
  Bottom 0.406: IC4.8 55.88,37.47 65.89,37.47 R5.2
N$32
  Bottom 0.406: R33.1 R32.1 43.06,11.43 IC20.4
N$33
  Top 0.254: IC2.14 16.69,35.66 16.69,40.92 18.75,42.98 X4.2
N$34
  Bottom 0.406: R31.1 R30.1 36.71,11.43 IC19.4
N$35
  Bottom 0.406: C1.2 69.85,20.95 IC1.32
N$36
  Bottom 0.254: R11.1 91.44,35.2 93.5,37.26 94.64,37.26 95.78,38.41 95.78,48.01 89.38,54.41 83.9,54.41 82.53,53.03 82.53,48.23 IC11.13
  Bottom 0.406: R10.1 81.28,44.45 IC11.13
N$37
  Bottom 0.406: C3.2 Q1.1 83.82,2.54 83.82,5.08 80.01,5.08 IC1.13
N$38
  Bottom 0.254: R9.1 78.87,33.38 78.87,35.43 81.15,37.72 94.41,37.72 95.33,38.63 95.33,47.78 94.41,48.69 93.04,48.69 91.44,47.09 IC11.9
  Bottom 0.406: R8.1 91.29,46.84 IC11.9
N$39
  Bottom 0.406: R17.2 110.49,10.64 IC10.8
N$40
  Bottom 0.254: R15.1 114.3,25.83 115.44,26.98 115.44,36.58 114.3,37.72 113.84,37.72 112.93,38.63 112.93,40.46 110.87,42.52 104.01,42.52 101.96,44.58 R14.1
  Bottom 0.406: R14.1 101.75,46.84 IC12.13
N$41
  Bottom 0.406: R23.1 R22.1 17.78,9.84 IC16.4
N$42
  Bottom 0.406: R3.1 49.53,11.43 IC1.1
N$43  (via drill 0.6)
  Top 0.406: v50.8,5.08 48.26,5.08 LED1.3
  Bottom 0.406: R3.2 50.8,11.43 v50.8,5.08
N$44
  Bottom 0.406: R44.2 R45.1 22.86,16.51 22.86,9.84 IC17.3
N$45
  Bottom 0.406: R25.1 R24.1 24.01,11.43 IC17.4
N$46
  Bottom 0.406: JP4.1 52.07,5.08 IC1.2
N$47
  Bottom 0.406: R27.1 R26.1 30.36,11.43 IC18.4
N$48
  Bottom 0.406: SL5.4 25.4,20.32 27.94,20.32 R47.1
N$49
  Bottom 0.406: R40.2 R41.1 10.16,16.51 10.16,9.84 IC15.3
N$50
  Top 0.254: IC1.29 77.5,24.23 77.5,26.29 77.72,26.52 77.72,29.26 76.81,30.18 60.58,30.18 58.52,28.12 IC4.2
N$51
  Bottom 0.254: IC7.2 94.87,26.29 89.15,26.29 88.7,25.83 86.87,25.83 85.27,24.23 IC1.26
N$52
  Bottom 0.406: SL6.1 33.02,19.05 R48.1
N$53
  Bottom 0.406: SL6.2 35.56,17.78 33.02,17.78 33.02,13.97 R31.2
N$54
  Bottom 0.406: SL5.3 22.86,17.78 20.32,17.78 20.32,13.97 R25.2
N$55
  Bottom 0.254: R7.2 72.69,39.32 72.24,39.32 68.58,35.66 IC5.8
N$56
  Top 0.254: 31.43,34.98 42.75,34.98 46.18,31.55 46.18,31.09 47.32,29.95 48.01,29.95 50.98,32.92 50.98,50.98 52.58,52.58 70.87,52.58 72.69,54.41 93.27,54.41 94.18,53.49 94.18,50.52 T1.E
  Top 0.406: D1.C 31.43,36.83 31.43,34.98 31.43,30.98 C26.1 33.02,31.11 IC3.IN
N$57
  Bottom 0.254: R13.1 104.01,33.38 104.01,37.03 101.73,39.32 IC12.2
  Bottom 0.406: R12.1 101.6,41.91 IC12.2
N$58  (via drill 0.61)
  Top 0.254: v107.9,22.4 v107.9,15.54
  Bottom 0.254: R17.1 109.96,13.49 v107.9,15.54 | v107.9,22.4 111.78,26.29 112.24,26.29 113.16,27.2 113.16,36.35 111.78,37.72 111.33,37.72 110.41,38.63 110.41,40.46 108.81,42.06 103.78,42.06 102.64,43.2 100.81,43.2 100.58,43.43 100.58,48.23 101.04,48.69 102.18,48.69 103.1,47.78 103.1,45.03 104.01,44.12 111.56,44.12 R16.1 | R17.1
  Bottom 0.406: R16.1 111.61,46.84 IC12.9
N$59
  Top 0.254: T1.C 93.27,52.58 90.75,52.58 89.38,53.95 83.44,53.95 82.75,53.26 82.75,50.29 85.04,48.01 85.04,42.98 86.18,41.83 C24.1 86.41,41.83 106.53,41.83 C25.1
  Top 0.406: IC11.4 C24.1 | C25.1 IC12.4
N$60
  Bottom 0.406: SL5.5 27.94,21.27 29.21,21.27 29.21,17.78 26.67,17.78 26.67,13.97 R27.2
N$61  (via drill 0.61)
  Top 0.254: v96.93,46.18 94.41,48.69 94.18,48.69 92.58,50.29 T1.B | v102.87,26.29 102.87,25.15 99.21,21.49 v99.21,19.43
  Bottom 0.254: v96.93,46.18 96.93,39.32 98.53,37.72 101.73,37.72 102.87,36.58 v102.87,26.29 | v99.21,19.43 92.58,19.43 90.98,17.83 R37.2
N$62
  Bottom 0.254: IC1.28 80.01,24.23 79.55,24.23 77.95,25.83 73.38,25.83 71.32,27.89 IC5.2
N$63
  Bottom 0.254: T2.C 88.24,15.09 88.24,17.6 R37.1
N$64
  Bottom 0.406: R36.2 89.22,12.7 T2.B
N$65
  Bottom 0.406: SL4.1 R38.1
N$66
  Bottom 0.406: SL4.3 8.26,19.05 R40.1
N$67
  Bottom 0.406: R38.2 R39.1 4.45,16.51 4.45,9.84 IC14.3
N$68
  Bottom 0.406: SL4.5 13.34,19.05 R42.2
N$69
  Bottom 0.406: SL4.2 5.71,20.95 4.45,20.95 4.45,17.78 1.91,17.78 1.91,13.97 R19.2
N$70
  Bottom 0.406: SL5.2 20,22.86 20,19.05 R44.1
N$71
  Top 0.254: IC1.27 82.75,24.23 82.75,26.98 83.67,27.89 IC6.2
N$72
  Bottom 0.406: R47.2 R46.1 29.21,16.51 29.21,9.84 IC18.3
N$73  (via drill 0.61)
  Top 0.254: v77.27,46.86 77.27,46.18 82.3,41.15 84.12,41.15 85.27,40.01 85.27,38.18 85.72,37.72 86.87,37.72 87.78,38.63 87.78,40.46 88.47,41.15 89.84,41.15 91.44,39.55 IC11.6
  Bottom 0.254: v77.27,46.86 77.27,46.18 75.21,44.12 71.09,44.12 67.44,40.46 67.44,38.41 67.89,37.95 69.49,37.95 69.95,38.41 69.95,38.63 72.01,40.69 73.84,40.69 74.98,39.55 75.67,39.55 R7.1
  Bottom 0.406: R6.1 91.12,41.91 91.12,39.69 IC11.6
N$74
  Bottom 0.406: R48.2 R49.1 35.56,16.51 35.56,9.84 IC19.3
N$76
  Bottom 0.406: SL6.3 38.1,19.05 R50.1
N$79
  Bottom 0.406: SL5.1 17.78,21.27 16.51,21.27 16.51,17.78 13.97,17.78 13.97,13.97 R23.2
N$80
  Bottom 0.406: R42.1 R43.1 16.51,16.51 16.51,9.84 IC16.3
N$89
  Bottom 0.406: SL6.4 40.64,20.64 41.91,20.64 41.91,17.78 39.37,17.78 39.37,13.97 R33.2
N$90
  Bottom 0.406: R50.2 R51.1 41.91,16.51 41.91,9.84 IC20.3
N$91
  Bottom 0.254: R5.1 68.81,39.55 70.18,39.55 71.78,41.15 76.12,41.15 77.72,39.55 77.72,38.18 78.18,37.72 79.55,37.72 81.15,39.32 IC11.2
  Bottom 0.406: IC11.2 81.43,39.37 R4.1
N$96
  Top 0.254: IC12.6 111.78,39.55 114.3,39.55 IC12.7
U
  Bottom 0.406: IC1.40 49.53,20.95 R29.1 49.68,20.32 R28.1 52.58,20.32 C28.1
VDD  (via drill 0.6)
  Top 0.254: IC6.1 81.15,28.12 81.15,32.69 76.58,37.26 75.44,37.26 73.84,35.66 IC5.6 73.61,35.43 73.15,35.43 71.55,33.83 67.44,33.83 64.01,37.26 60.96,37.26 | IC6.6 86.41,35.43 93.95,27.89 IC7.1 | IC8.6 111.78,35.43 112.24,35.43 113.84,33.83 114.76,33.83 115.44,34.52 115.44,36.58 114.3,37.72 103.1,37.72 102.64,37.26 100.81,37.26 99.21,35.66 IC7.6 | 11.66,8.23 11.66,8.26 11.66,8.69 C10.1 | JP7.4 29.26,51.89 30.63,51.89 41.83,40.69 41.83,39.32 44.35,36.8 44.35,36.35 JP3.1 44.58,36.12 47.55,33.15 47.55,31.32 IC13.OUT
  Top 0.406: C9.1 6.35,8.89 v6.35,6.99 6.35,6.03 12.7,6.03 | 12.06,8.26 11.66,8.26 11.56,8.26 | C10.1 12.7,8.89 v12.7,6.99 12.7,6.03 | C11.1 18.73,8.89 v18.73,6.99 18.73,6.03 | 12.7,6.03 18.73,6.03 | C12.1 25.4,8.89 v25.4,6.99 25.4,6.03 | 25.4,6.03 18.73,6.03 | C13.1 31.43,8.89 v31.43,6.99 31.43,6.03 | 25.4,6.03 31.43,6.03 | C14.1 36.96,8.57 37.78,8.57 v37.78,6.99 37.78,6.03 | 37.78,6.03 31.43,6.03 | C15.1 43.81,8.89 v43.81,6.99 43.81,6.03 | 43.81,6.03 37.78,6.03 | 43.81,6.03 43.81,2.71 LED1.1 47.62,2.71 47.62,1.27 59.69,1.27 JP1.2 | R1.1 54.61,40.64 60.33,40.64 R2.1 60.96,39.37 60.96,37.26 IC4.6
  Bottom 0.254: 105.09,10.16 105.16,10.29 105.16,17.6 105.09,17.65 | 105.09,22.86 106.3,22.86 110.41,26.98 110.41,30.16 110.41,30.18 | IC16.6 17.83,8 18.06,8 18.97,8.91 18.97,25.83 17.6,27.2 17.6,31.55 15.32,33.83 13.03,33.83 11.43,35.43 IC2.16 11.43,35.66 11.89,35.66 18.29,42.06 19.43,42.06 20.34,42.98 20.34,44.12 21.72,45.49 21.72,46.18 27.43,51.89 29.03,51.89 JP7.4 | R1.1 54.41,39.32 54.41,35.43 50.98,32 C23.1
  Bottom 0.406: IC14.6 5.71,7.94 5.71,6.99 v6.35,6.99 | IC15.6 12.06,7.94 12.06,6.99 v12.7,6.99 | v18.73,6.99 17.66,6.99 IC16.6 | IC17.6 24.13,7.94 24.13,6.99 v25.4,6.99 | v31.43,6.99 30.36,6.99 IC18.6 | IC19.6 36.83,7.94 36.83,6.99 v37.78,6.99 | v43.81,6.99 43.06,6.99 IC20.6 | IC10.6 106.68,5.08 C16.1 105.09,4.95 105.09,10.16 IC10.1 | IC9.6 106.68,17.78 C22.1 105.09,17.65 105.09,22.86 IC9.1 | IC8.6 111.76,31.75 C21.1 112.08,31.75 112.08,30.16 110.41,30.16 106.68,30.16 IC8.1 | IC7.6 99.06,31.75 C20.1 99.38,31.75 99.38,30.16 93.98,30.16 IC7.1 | 86.36,31.75 IC6.6 | C18.1 86.36,31.75 | 86.36,31.75 86.36,29.84 81.28,29.84 IC6.1 | C17.1 73.66,31.75 | 73.66,31.75 IC5.6 | 73.66,31.75 73.66,30.16 68.58,30.16 IC5.1 | 60.96,31.75 IC4.6 | C19.1 60.96,31.75 | 60.96,31.75 60.96,30.16 55.88,30.16 IC4.1 | C23.1 50.8,31.11 IC13.OUT | C7.2 7.62,35.56 IC2.16
  pour Bottom: 115.89,54.93 0.95,54.93 0.95,0.95 115.89,0.95 115.89,54.61
VREF
  Top 0.254: IC12.3 104.01,39.32 102.41,37.72 90.53,37.72 88.92,39.32 IC11.5 | R34.2 40.69,27.2 41.15,27.2 42.29,26.06 44.81,26.06 53.49,34.75 53.49,40.46 58.75,45.72 60.35,45.72 61.04,46.41 61.04,48.46 64.69,52.12 76.35,52.12 79.78,48.69 82.07,48.69 83.67,47.09 IC11.12 | IC12.12 104.01,46.86 103.56,46.86 101.96,45.26 90.53,45.26 88.92,46.86 IC11.10
  Top 0.406: R35.1 R34.2
  Bottom 0.406: IC11.5 88.9,44.77 | 88.9,44.77 IC11.10 | IC12.10 109.22,44.77 104.14,44.77 IC12.12 | IC11.12 83.82,44.77 | 83.82,44.77 88.9,44.77 | IC11.3 83.82,44.77

## Text on the board
Bottom: Electronic load V01.1 DK1RI